# EAGLE board charger_v2 (EAGLE 9.6.1)
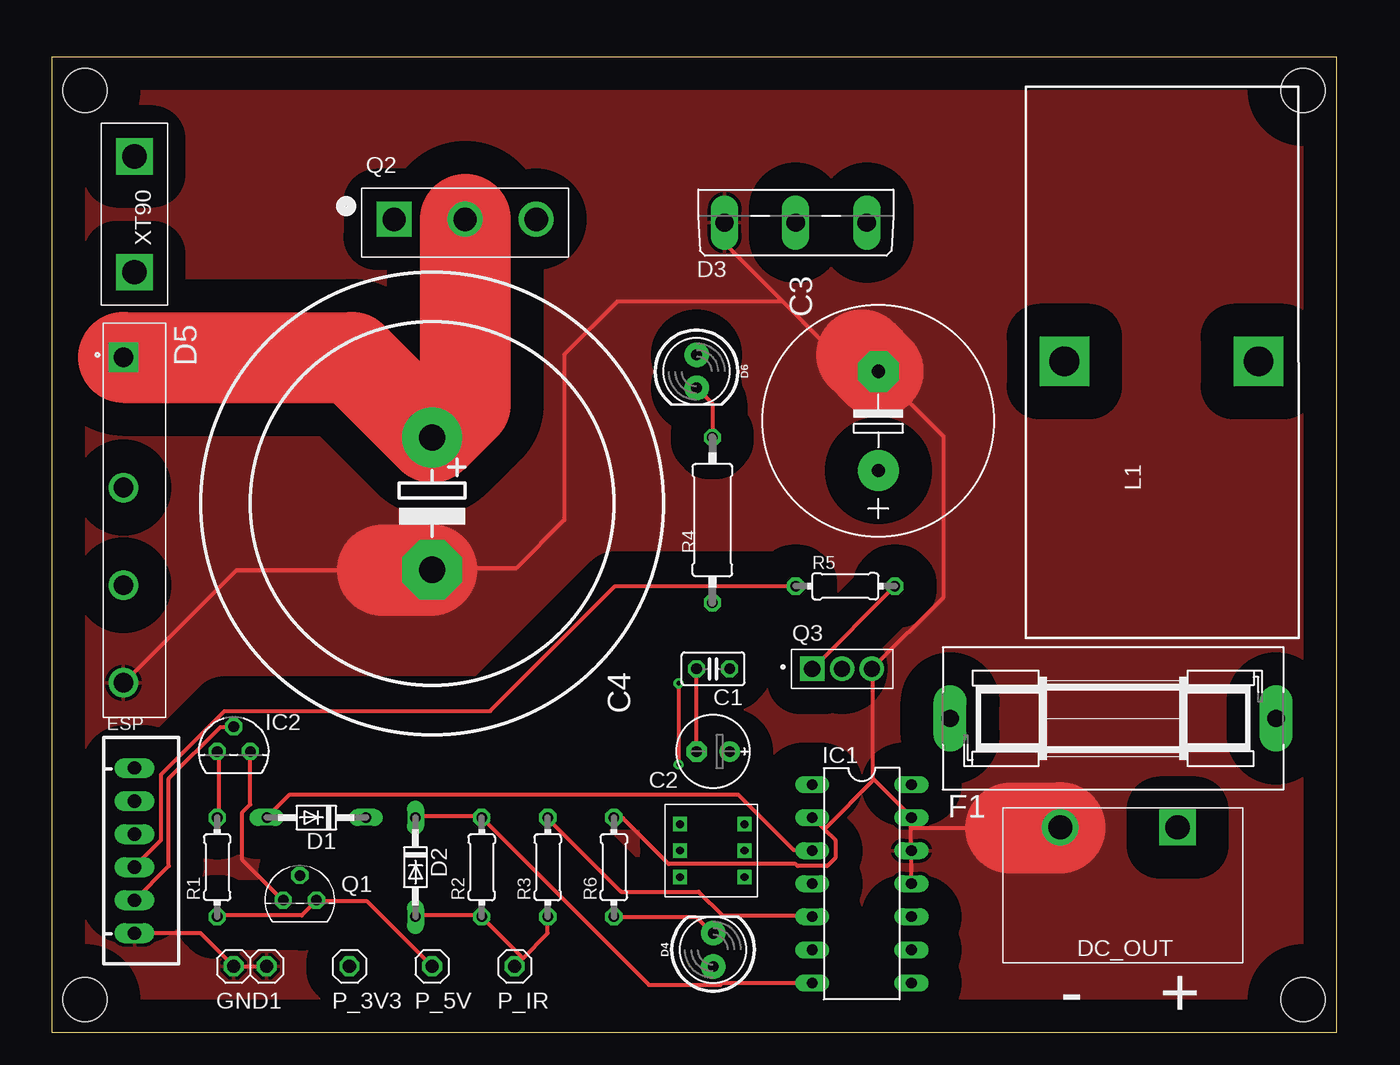
[diagram p0: board, top side]
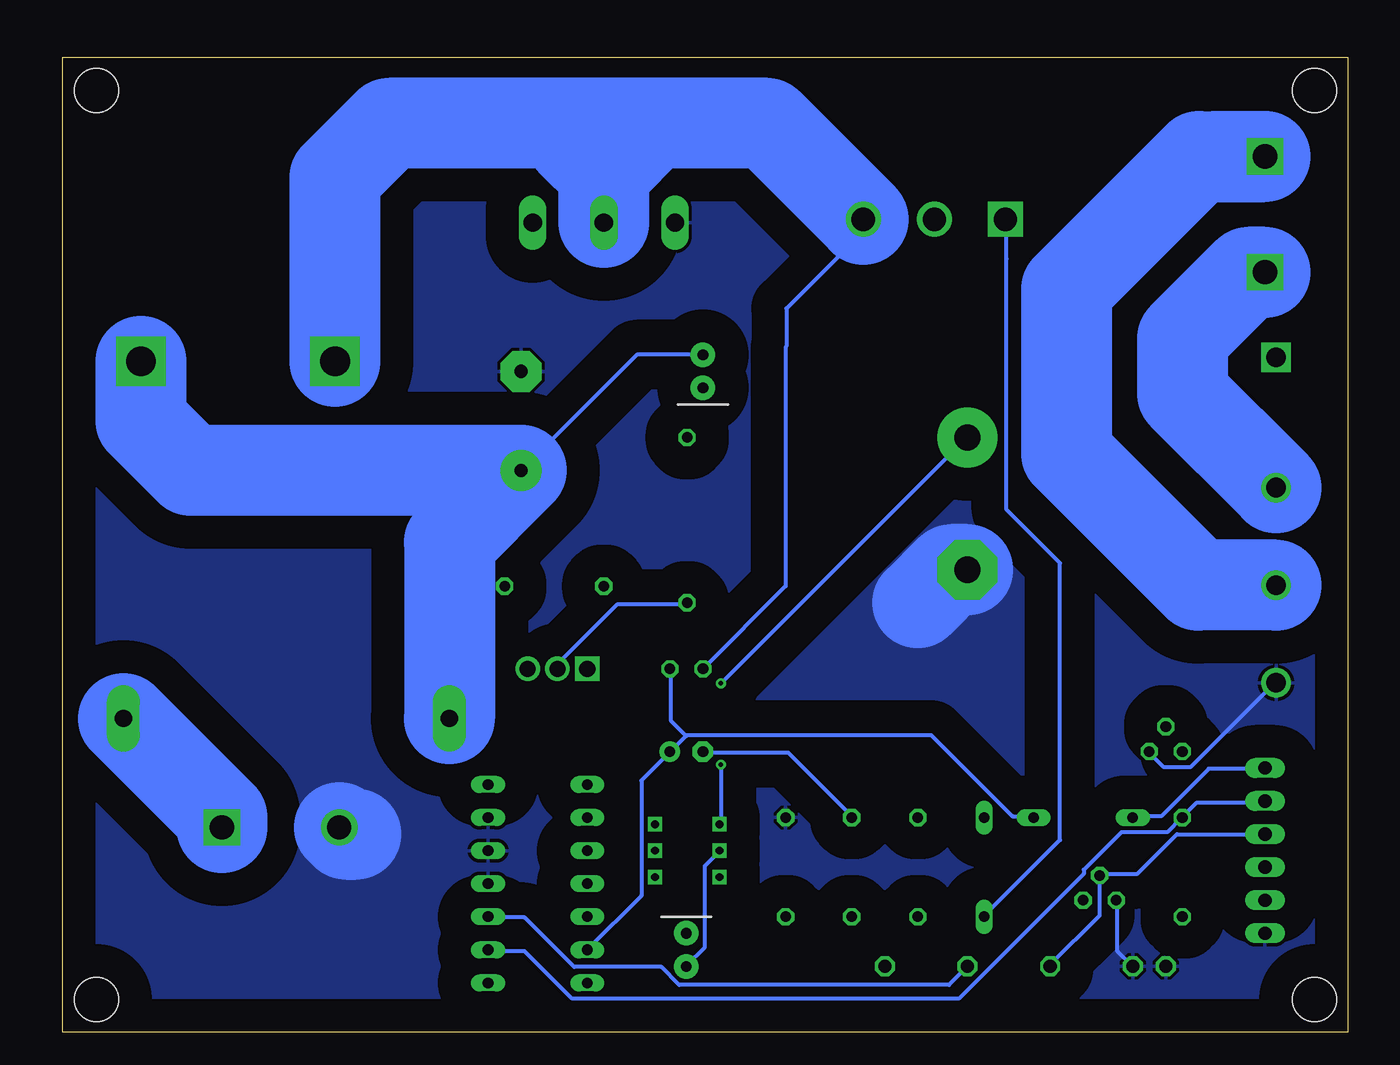
[diagram p1: board, bottom side, seen from below]

Size 98.73 x 74.92 mm. Coordinates in mm from the lower left corner, seen from the top.
Outline: 0,0 98.73,0 98.73,74.92 0,74.92 0,0
Copper layers (1*16): Top 0.035mm / dielectric 1.5mm / Bottom 0.035mm
Design rules "default *": minimum track width 12mil, minimum drill 0.35mm, track to track 12mil, track to pad 12mil, pad to pad 12mil, via to via 12mil, smd to smd 12mil, copper to edge 40mil, drill to drill 6mil, minimum pad ring 10mil, minimum via ring 8mil, stop-mask expansion 4mil, vias tented up to drill 0mil, thermal gap 10mil
Net classes: 0 default: width 0.305 mm; 1 power: width 6.985 mm, clearance 0.508 mm to class 0; 2 pwm_12: width 0.305 mm, clearance 0.508 mm to class 0, clearance 0.508 mm to class 1
Holes 3.4 mm at 2.54,72.39 96.14,72.39 2.54,2.54 96.14,2.54

## Footprints (pad centres in the part's own frame; a part is rotated, then mirrored left to right if it is on the bottom)
XT90-PAD = drill 1.854 square: P$1 0,5.08; P$2 0,-3.81
C025-025X050 = drill 0.813 octagon: 1 -1.27,0; 2 1.27,0
E2,5-6E = drill 0.813 pad 1.575: + -1.27,0 | drill 0.813 pad 1.575 octagon: - 1.27,0
E7,5-18 = drill 1.016 pad 3.15: + -3.81,0 | drill 1.016 pad 3.15 octagon: - 3.81,0
EB35D = drill 2.007 pad 4.597: + -5.08,0 | drill 2.007 pad 4.597 octagon: - 5.08,0
DO34-7 = drill 0.813 long: A 3.81,0; C -3.81,0
SOT93S = drill 1.397 long: A1 -5.461,-2.54; A2 5.461,-2.54; C 0,-2.54
LED_5MM = drill 0.813 pad 1.88: A -1.27,0; K 1.27,0
DIOB_GBJ3510-BP = drill 1.51 pad 2.27 square: 1 -12.5,-0.85 | drill 1.51 pad 2.27: 2 -2.5,-0.85; 3 5,-0.85; 4 12.5,-0.85
TE_1977477-2 = drill 1.85 square: 1 -3.241,-5.334 | drill 1.85: 2 5.781,-5.334
JST-XH-06-PACKAGE-LONG-PAD = drill 1.016 long: 1 -6.35,0; 2 -3.81,0; 3 -1.27,0; 4 1.27,0; 5 3.81,0; 6 6.35,0
SH25 = drill 1.321 pad 2.54 long: 1 -12.522,0; 2 12.522,0
1X01 = drill 1.016 octagon: 1 0,0
DIL14 = drill 0.813 long: 1 -7.62,-3.81; 2 -5.08,-3.81; 3 -2.54,-3.81; 4 0,-3.81; 5 2.54,-3.81; 6 5.08,-3.81; 7 7.62,-3.81; 8 7.62,3.81; 9 5.08,3.81; 10 2.54,3.81; 11 0,3.81; 12 -2.54,3.81; 13 -5.08,3.81; 14 -7.62,3.81
TO92 = drill 0.813 octagon: 1 -1.27,0; 2 0,1.905; 3 1.27,0
TJ7-U1 = drill 2.286 pad 3.81 square: 1 -6.503,4.826; 2 8.408,4.826
TO247AC = drill 1.79 pad 2.69 square: 1 -5.46,0.255 | drill 1.79 pad 2.69: 2 0,0.255; 3 5.46,0.255
TO229P780X300X1364-3 = drill 1.25 square: 1 0,0 | drill 1.25: 2 2.29,0; 3 4.58,0
0204/7 = drill 0.813 octagon: 1 -3.81,0; 2 3.81,0
0309/12 = drill 0.813 octagon: 1 -6.35,0; 2 6.35,0
TL-2230 = drill 0.6 square: 1 -2.032,-2.54; 2 0,-2.54; 3 2.032,-2.54; 4 -2.032,2.413; 5 0,2.413; 6 2.032,2.413

## Placement (x,y rotation side)
AC_IN  XT90A  [XT90-PAD]  6.35,63.5 180 top
C1  100nF  [C025-025X050]  50.8,27.94 180 top
C2  22uF  [E2,5-6E]  50.8,21.59 180 top
C3  150uF  [E7,5-18]  63.5,46.99 90 top
C4  470uF  [EB35D]  29.21,40.64 270 top
D1  UF4007  [DO34-7]  20.32,16.51 180 top
D2  UF4007  [DO34-7]  27.94,12.7 270 top
D3  PBYR3035  [SOT93S]  57.15,64.77 0 top
D4  [LED_5MM]  50.8,6.35 90 top
D5  GBJ3510-BP  [DIOB_GBJ3510-BP]  6.35,39.37 270 top
D6  [LED_5MM]  49.53,50.8 270 top
DC_OUT  1977477-2  [TE_1977477-2]  83.25,10.41 180 top
ESP  JST-XH-06-PIN-LONG-PAD  [JST-XH-06-PACKAGE-LONG-PAD]  6.35,13.97 270 top
F1  [SH25]  81.53,24.13 0 top
GND1  [1X01]  13.97,5.08 0 top
GND2  [1X01]  16.51,5.08 0 top
IC1  IR2110D  [DIL14]  62.23,11.43 270 top
IC2  LM35CZ  [TO92]  13.97,21.59 0 top
L1  1mH  [TJ7-U1]  84.3,46.74 0 top
P_3V3  [1X01]  22.86,5.08 0 top
P_5V  [1X01]  29.21,5.08 0 top
P_IR  [1X01]  35.56,5.08 0 top
Q1  2N7000  [TO92]  19.05,10.16 0 top
Q2  IRFP240  [TO247AC]  31.75,62.23 0 top
Q3  MJE13003G  [TO229P780X300X1364-3]  58.42,27.94 0 top
R1  10k  [0204/7]  12.7,12.7 90 top
R2  10  [0204/7]  33.02,12.7 90 top
R3  1k  [0204/7]  38.1,12.7 90 top
R4  68k  [0309/12]  50.75,39.37 90 top
R5  2.7k  [0204/7]  60.96,34.29 0 top
R6  10k  [0204/7]  43.18,12.7 90 top
U$1  SWITCH-DPDT-7X7A  [TL-2230]  50.8,13.97 270 top

## Library data of the parts
AC_IN U$1 = TA_library
C1-C4 = rcl; SPICEPREFIX: C
D1-D3 = diode
D4 D6 = Sparkfun_LED
D5 = GBJ3510-BP; AVAILABILITY: In Stock; DESCRIPTION: Bridge Rectifier Single Phase Standard 1 kV Through Hole GBJ; MF: Micro Commercial; MP: GBJ3510-BP; PACKAGE: SIP-4 Micro Commercial Co; PRICE: None; PURCHASE-URL: https://pricing.snapeda.com/search/part/GBJ3510-BP/?ref=eda
DC_OUT = terminal_block_TA; AVAILABILITY: In Stock; COMMENT: 1977477-2; DESCRIPTION: Conn Barrier Strip 2 POS 8.25mm Solder ST Thru-Hole 15A/Contact Carton; MF: TE Connectivity; MP: 1977477-2; PACKAGE: None; PRICE: None; PURCHASE-URL: https://pricing.snapeda.com/search/part/1977477-2/?ref=eda
ESP = Rembrandt Electronics - JST XH Connectors v1-0
F1 = fuse; MF: SCHURTER; MPN: 0031.8211; OC_FARNELL: 1162741; OC_NEWARK: 96B9380
GND1 GND2 P_3V3 P_5V P_IR = pinhead
IC1 = irs
IC2 = lm35
L1 = custom_inductor; SPICEPREFIX: L
Q1 = 2N7000; AVAILABILITY: In Stock; DESCRIPTION: N-Channel 60V 350mA (Tc) 1W (Tc) Through Hole TO-92-3; MF: STMicroelectronics; MP: 2N7000; PACKAGE: E-PKG AXIAL-LEADED-2 ON Semiconductor; PRICE: None
Q2 = IRFP240(TO-247); AVAILABILITY: In Stock; DESCRIPTION: N-Channel 200 V 20A (Tc) 150W (Tc) Through Hole TO-247AC; MF: Vishay Siliconix; MP: IRFP240; PACKAGE: TO-247 Vishay Siliconix; PRICE: None
Q3 = MJE13003G; AVAILABILITY: Not in stock; DESCRIPTION: Bipolar (BJT) Transistor NPN 400 V 1.5 A 10MHz 1.4 W Through Hole TO-126; MF: ON Semiconductor; MP: MJE13003G; PACKAGE: TO-126 ON Semiconductor; PRICE: None
R1-R6 = rcl; SPICEPREFIX: R

## Nets
5V: ESP.2 IC1.9 IC2.1 R1.2
12V: D1.A ESP.1 IC1.3
AC_1 [power]: AC_IN.P$1 D5.2
AC_2 [power]: AC_IN.P$2 D5.3
GND: C3.- C4.- D3.A1 D5.4 DC_OUT.2 ESP.6 GND1.1 GND2.1 IC1.2 IC1.11 IC1.12 IC1.13 IC2.3 Q1.1 Q3.3 R6.2
HVDC: C4.+ D5.1 Q2.2 U$1.1
N$1: D2.C IC1.7 R2.2
N$2: D4.A U$1.2
N$3: Q3.2 R4.1
N$4: D6.K R4.2
N$5: Q3.1 R5.2
N$8: D4.K R6.1
NMOS_SOURCE: C1.2 C2.- D3.C IC1.5 L1.1 Q2.3 R3.2
PWM_5V: IC1.10 P_5V.1 Q1.3 R1.1
PWM_12V [pwm_12]: D2.A P_IR.1 Q2.1 R2.1 R3.1
PWM_SW1: ESP.3 P_3V3.1 Q1.2
PWM_SW2: ESP.4 R5.1
TEMP: ESP.5 IC2.2
V_OUT: C3.+ D6.A F1.1 L1.2
V_OUT_FUSE [power]: DC_OUT.1 F1.2
VB: C1.1 C2.+ D1.C IC1.6

## Tracks (layer width: path | path; a pad name or v marks a point on that pad's centre or on a via)
5V  (via drill 0.35)
  Top 0.305: v12.8,16.61 12.8,21.49 IC2.1 | v12.8,16.46 R1.2 v12.65,16.61
  Bottom 0.305: v12.8,16.61 R1.2 | v12.8,16.46 13.87,15.39 17.37,15.39 20.27,12.5 20.27,12.19 29.87,2.59 59.59,2.59 63.25,6.25 65.99,6.25 IC1.9 | v12.65,16.61 11.58,17.68 6.4,17.68 ESP.2
12V
  Top 0.305: D1.A 18.29,18.29 52.73,18.29 57,14.02 58.37,14.02 IC1.3
  Bottom 0.305: D1.A 16.46,16.61 14.33,16.61 10.67,20.27 6.4,20.27 ESP.1
AC_1
  Bottom 6.985: AC_IN.P$1 7.62,58.42 12.7,53.34 12.7,49.07 D5.2
AC_2
  Bottom 6.985: 10.16,67.31 AC_IN.P$2 11.43,67.31 21.59,57.15 21.59,44.45 11.51,34.37 D5.3
GND
  Top 0.305: IC2.3 15.24,17.53 14.63,16.92 14.63,13.26 17.68,10.21 Q1.1 | GND2.1 16.46,5.03 14.02,5.03 GND1.1 11.43,7.62 ESP.6 | 25.4,35.51 14.17,35.51 5.64,26.98 D5.4 | 51.82,62.18 D3.A1 51.82,62.03 51.82,60.5 56.16,56.16 | 59.36,15.62 58.52,16.46 IC1.2 | 59.36,15.62 60.2,14.78 60.2,13.41 59.59,12.8 57.3,12.8 57.15,12.95 47.4,12.95 43.89,16.46 43.28,16.46 R6.2 | IC1.11 65.99,11.43 65.99,13.87 IC1.12 65.99,14.02 65.99,15.7 | 65.99,15.7 65.99,16.46 IC1.13 65.99,16.61 63.17,19.43 | 63.17,19.43 63.09,19.51 63.09,27.89 Q3.3 63.09,28.04 68.53,33.48 68.53,45.77 C3.- 63.4,50.9 61.42,50.9 59.33,52.98 56.16,56.16 | 73.66,15.7 65.99,15.7 | 63.17,19.43 59.36,15.62 | C4.- 29.26,35.66 35.66,35.66 39.37,39.37 39.37,52.07 43.46,56.16 56.16,56.16
  Top 6.985: DC_OUT.2 77.42,15.7 73.66,15.7 | C3.- 62.23,52.07 | C4.- 29.16,35.51 25.4,35.51
  Bottom 0.305: GND2.1 17.68,6.25 17.68,10.06 Q1.1 | D5.4 5.64,26.82 12.04,20.42 14.17,20.42 15.24,21.49 IC2.3
  Bottom 6.985: C4.- 30.48,35.56 33.02,33.02 | DC_OUT.2 76.96,15.24 76.2,15.24
  pour Bottom (isolate 2.54): -3.81,77.47 102.87,77.47 104.14,76.2 104.14,-7.62 -8.89,-7.62 -8.89,72.39
  pour Top (isolate 2.54): -2.54,78.74 105.41,78.74 106.68,77.47 106.68,-6.35 -3.81,-6.35 -5.08,-5.08 -5.08,76.2
HVDC  (via drill 0.35)
  Top 0.305: v48.16,26.82 v48.16,20.57
  Top 6.985: D5.1 23.06,51.87 C4.+ 31.75,48.26 Q2.2
  Bottom 0.305: v48.16,20.57 48.16,16 U$1.1 | v48.16,26.82 29.26,45.72 C4.+
N$1
  Top 0.305: D2.C 28.04,16.61 32.92,16.61 R2.2 45.87,3.66 51.36,3.66 51.51,3.81 IC1.7
N$2
  Bottom 0.305: U$1.2 48.31,13.87 49.38,12.8 49.38,6.55 50.75,5.18 D4.A
N$3
  Bottom 0.305: R4.1 50.75,32.92 56.08,32.92 60.66,28.35 60.66,28.04 Q3.2
N$4
  Top 0.305: R4.2 50.75,48.31 D6.K
N$5
  Top 0.305: Q3.1 R5.2
N$8
  Top 0.305: R6.1 43.28,8.84 49.53,8.84 50.75,7.62 D4.K
NMOS_SOURCE
  Top 0.305: C2.- C1.2 | IC1.5 58.37,8.99 51.51,8.99 49.68,10.82 43.74,10.82 38.1,16.46 R3.2
  Bottom 0.305: C2.- 49.53,21.49 42.98,21.49 38.1,16.61 R3.2 | C1.2 43.18,34.29 43.18,52.63 43.13,52.73 43.13,55.63 39.17,59.59 Q2.3
  Bottom 6.985: Q2.3 44.58,69.85 53.34,69.85 | L1.1 77.8,65.71 73.66,69.85 58.23,69.85 | 53.34,69.85 57.15,66.04 | 58.23,69.85 57.15,68.77 D3.C 57.15,66.04 | 53.34,69.85 58.23,69.85 | 57.15,66.04 59.69,68.58
PWM_5V  (via drill 0.35)
  Top 0.305: v12.8,8.99 19.2,8.99 20.27,10.06 Q1.3 20.42,10.06 24.23,10.06 P_5V.1
  Bottom 0.305: v12.8,8.99 R1.1 | P_5V.1 30.63,3.66 51.36,3.66 52.73,5.03 59.44,5.03 63.25,8.84 65.99,8.84 IC1.10
PWM_12V
  Top 0.305: D2.A 28.04,8.99 32.92,8.99 R2.1 36.2,5.71 | R3.1 38.1,7.62 36.2,5.71 | P_IR.1 36.2,5.71
  Bottom 0.305: D2.A 27.89,8.99 22.1,14.78 22.1,36.07 26.21,40.18 26.21,59.44 26.21,62.48 Q2.1
PWM_SW1
  Bottom 0.305: P_3V3.1 22.86,5.18 19.05,8.99 Q1.2 19.05,12.19 16.15,12.19 13.11,15.24 ESP.3
PWM_SW2
  Top 0.305: R5.1 43.28,34.29 33.68,24.69 13.26,24.69 8.38,19.81 8.38,14.78 6.4,12.8 ESP.4
TEMP
  Top 0.305: ESP.5 8.99,12.8 8.99,19.51 12.95,23.47 13.87,23.47 IC2.2
V_OUT
  Bottom 0.305: D6.A 54.61,52.07 C3.+
  Bottom 6.985: L1.2 92.71,46.99 88.9,43.18 C3.+ 69.01,37.67 F1.1
V_OUT_FUSE
  Bottom 6.985: F1.2 86.49,16.57 DC_OUT.1
VB
  Bottom 0.305: IC1.6 54.25,10.52 54.25,19.36 52.12,21.49 C2.+ 51.97,21.64 50.83,22.78 | 50.83,22.78 50.75,22.86 32,22.86 25.76,16.61 24.23,16.61 D1.C | 50.83,22.78 51.97,23.93 51.97,27.89 C1.1

## Text on the board
tPlace: - | +